# Altium PCB pcb.PcbDoc
Units mil, origin at the board's own origin, x right, y up, seen from the top; angles counter-clockwise.
Board outline 6000 x 4000 mil, 2 copper layers (Top Layer, Bottom Layer); 4 components, 11 nets, 48 pads, 0 vias.
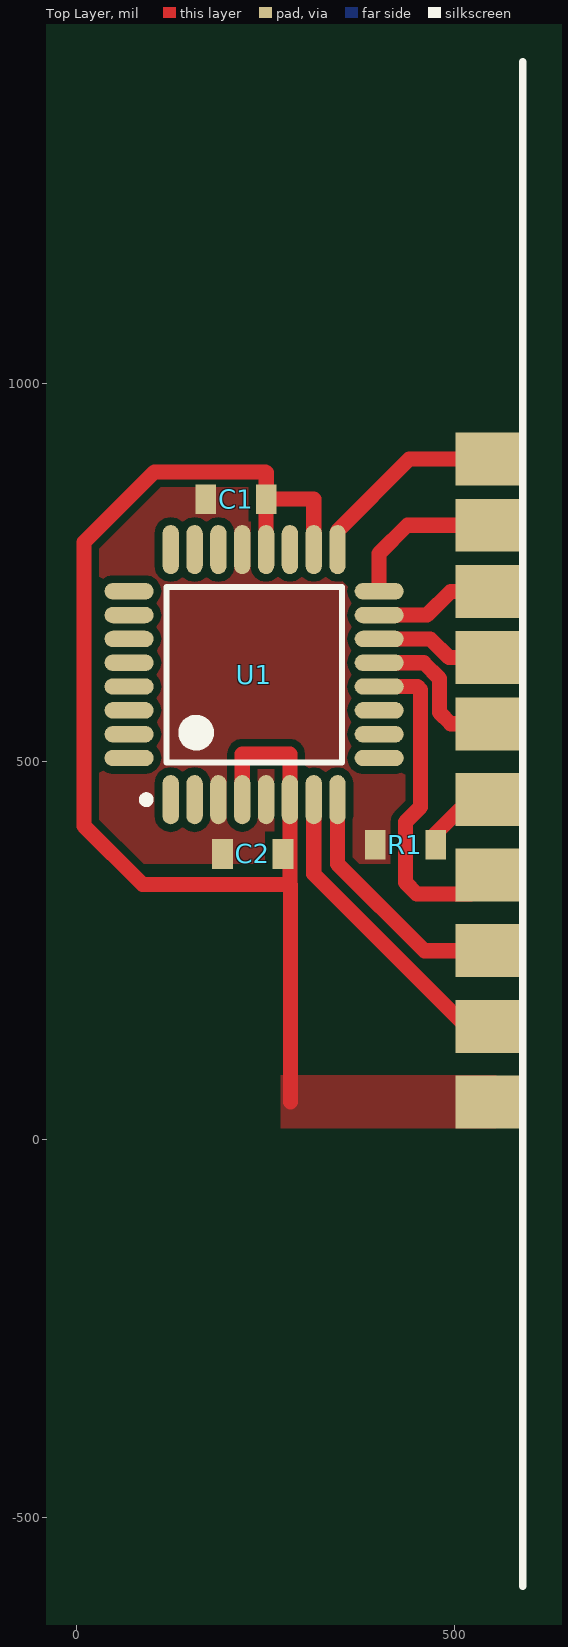
[diagram p0: Top Layer view]
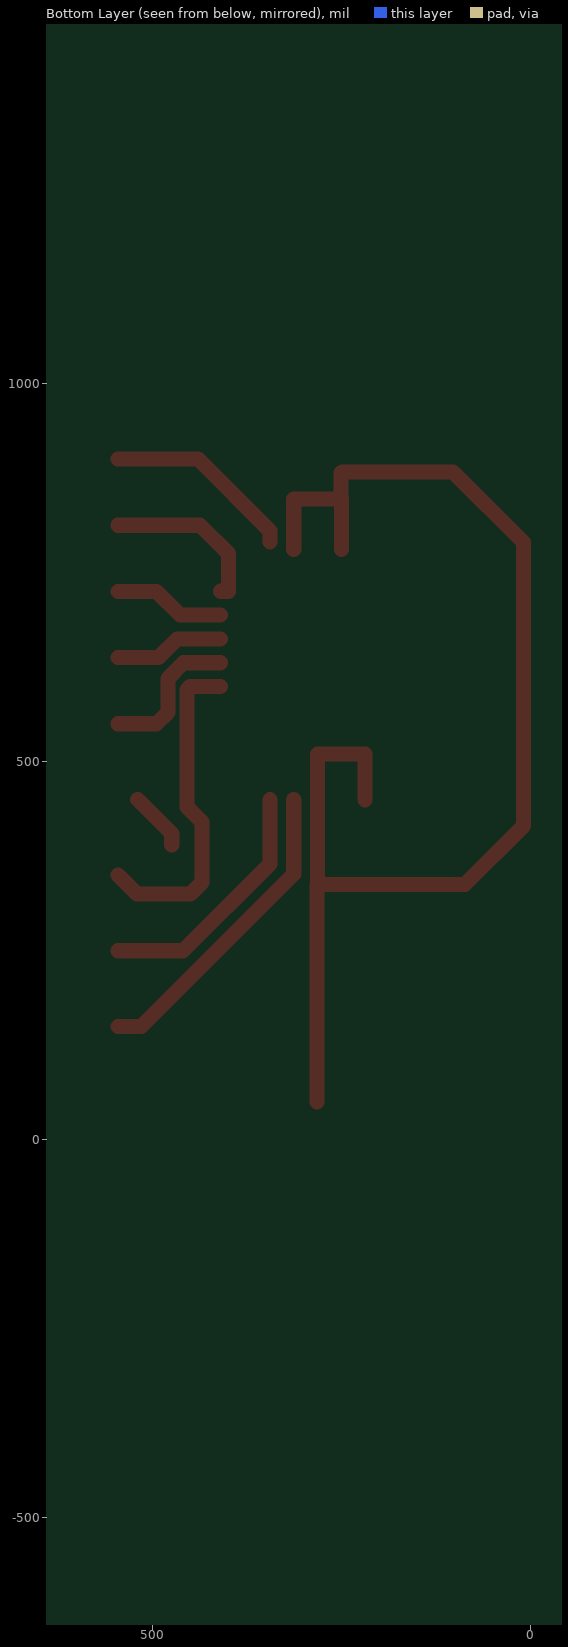
[diagram p1: Bottom Layer view, seen from below]

## Layer stack, top to bottom
Top Solder: solder mask 0.4, Solder Resist, Dk 3.5
Top Layer: signal copper 1.4
Dielectric 1: dielectric 12.6, FR-4, Dk 4.8
Bottom Layer: signal copper 1.4
Bottom Solder: solder mask 0.4, Solder Resist, Dk 3.5

## Board outline
-3425,-1550 2575,-1550 2575,2450 -3425,2450

## Design rules (kind name [scope] priority, off if disabled: settings)
Clearance [All] p1: gap=5 except(10: Arc-Poly Track-Poly SMDPad-Poly THPad-Poly Via-Poly Fill-Poly Poly-Poly; 20: Arc-Region Track-Region SMDPad-Region THPad-Region Via-Region Fill-Region Poly-Region Region-Region)
PolygonConnect [All] p1: connectstyle=Direct reliefconductorwidth=10 reliefentries=4 polygonreliefangle="90 Angle" airgapwidth=10
RoutingVias [All] p1: holewidth=28 width=50 viastyle="Through Hole" minholewidth=28 minwidth=50 maxholewidth=28 maxwidth=50
SolderMaskExpansion [All] p1: expansion=4
Width [All] p1: maxlimit=120 minlimit=10 preferedwidth=10
30 further rules are at their usual default settings.

## Components (designator, comment, footprint, x,y, rotation, side; value= is the part's Value field where it differs from the comment)
C1 "Cap" 0603x 211,847 r180 top
C2 "Cap" 0603x 233,378 r180 top
R1 "Res1" 0603x 435,390 r180 top
U1 "ATmega168-15AD" 32MA_N 235,615 r90 top

## Footprints (in the part's own frame and the unit in brackets; to place one, negate y for a bottom-side part, rotate by r counter-clockwise, add the part's x,y. Pads: shape width x height; smd on the part's side, far side on the other; paste and mask are expansions set on the pad)
32MA_N [mm] "Thin QFP, 32-Leads, Body 7x7mm, Pitch 0.8mm, IPC Medium Density"
  oval 1.65x0.55 smd: 1(-4.2,2.8) 2(-4.2,2) 3(-4.2,1.2) 4(-4.2,0.4) 5(-4.2,-0.4) 6(-4.2,-1.2) 7(-4.2,-2) 8(-4.2,-2.8) 17(4.2,-2.8) 18(4.2,-2) 19(4.2,-1.2) 20(4.2,-0.4) 21(4.2,0.4) 22(4.2,1.2) 23(4.2,2) 24(4.2,2.8)
  oval 0.55x1.65 smd: 9(-2.8,-4.2) 10(-2,-4.2) 11(-1.2,-4.2) 12(-0.4,-4.2) 13(0.4,-4.2) 14(1.2,-4.2) 15(2,-4.2) 16(2.8,-4.2) 25(2.8,4.2) 26(2,4.2) 27(1.2,4.2) 28(0.4,4.2) 29(-0.4,4.2) 30(-1.2,4.2) 31(-2,4.2) 32(-2.8,4.2)
  silkscreen extent -4.32,-2.95 2.95,3.75, body extent -3.5,-3.5 3.5,3.5, height 1.2
0603x [mm] "Chip Resistor; Body 1.6 x 0.8 mm (LxW typ)"
  rect 0.7x1 smd: 1(-1.016,0) 2(1.016,0)

## Part data
C1 C2: "Capacitor"
R1: "Resistor"
U1: "8-bit Automotive AVR Microcontroller, 16KB Flash, 512 Bytes EEPROM, 1KB SRAM, Extended Grade (-40°C to +150°C), 32-Pin TQFP"

## Free pads (board coordinates)
  rect 90x70 smd: 0(546,50) 0(546,150) 0(546,250) 0(546,350) 0(546,450) 0(546,550) 0(546,637.5) 0(546,725) 0(546,812.5) 0(546,900)

## Nets (pads, with @x,y where several pads share a name; then routed paths per layer and width w, separated by ;. In a path a pad name is that pad's centre, name@x,y a point inside that pad or via, vN(x,y) a via of type N, cw(c..) or ccw(c..) an arc to the next point about the centre after c; other vN are vias at no path point)
FAKEGND: pad.0@546,450 R1.1 | length 78.6
  Top Layer w20: R1.1 475,405 pad.0@520,450
GND: C1.2 C2.2 R1.2 U1.3 U1.5 U1.21
I0: pad.0@546,350 U1.12 | length 437.3
  Top Layer w20: U1.12@410.35,599.25 450.75,599.25 455,595 455,440 435,420 435,340 450,325 521,325 pad.0@546,350
I1: pad.0@546,550 U1.13 | length 195.5
  Top Layer w20: U1.13@410.35,630.75 459.25,630.75 480,610 480,565 495,550 pad.0@546,550
I2: pad.0@546,637.5 U1.14 | length 145.9
  Top Layer w20: U1.14@410.35,662.24 467.76,662.24 492.5,637.5 pad.0@546,637.5
I3: pad.0@546,725 U1.15 | length 148.6
  Top Layer w20: U1.15@410.35,693.74 463.74,693.74 495,725 pad.0@546,725
I4: pad.0@546,812.5 U1.16 | length 221.7
  Top Layer w20: U1.16@410.35,725.24 400,725.24 400,775 437.5,812.5 pad.0@546,812.5
I5: pad.0@546,900 U1.17 | length 254.8
  Top Layer w20: U1.17@345,790.59 345,805 440,900 pad.0@546,900
I6: pad.0@546,150 U1.7 | length 414
  Top Layer w20: U1.7 313.74,351.26 515,150 pad.0@546,150
I7: pad.0@546,250 U1.8 | length 333.2
  Top Layer w20: U1.8 345.24,364.76 460,250 pad.0@546,250
NetC1_1: C1.1 C2.1 pad.0@546,50 U1.4 U1.6 U1.18 U1.20 | length 1771.5
  Top Layer w20: U1.4 219.25,510 282.24,510 U1.6 282.24,337.76 ; 250,883 103,883 10,790 10,415 87.24,337.76 282.24,337.76 ; U1.20 C1.1@250.75,847 ; 251,882 C1.1 312.74,847 ; 283,50 283,337 282.24,337.76 ; U1.18 313.74,847
pads on no net: U1.1 U1.2 U1.9 U1.10 U1.11 U1.19 U1.22 U1.23 U1.24 U1.25 U1.26 U1.27 U1.28 U1.29 U1.30 U1.31 U1.32

## Polygon pours and split planes (outlines as drawn)
NetC1_1 on Top Layer "Top Layer-No Net" (solid, pour order 2): 270,85 270,15 555,15 555,85
GND on Top Layer "Top Layer-No Net" (solid, remove dead copper, pour order 0): 495,940 25,940 25,365 495,365

## Other copper
Top Layer:
  pour cut-out: 340,845 340,750 365,725 365.24,725.24 410.35,725.24 410.35,844.65 410,845

## Silkscreen, mask and mechanical layers (free items; w line width, h text height)
Top Overlay:
  lines w10: 590,-590 590,1425